# EAGLE board MK (EAGLE 9.6.2)
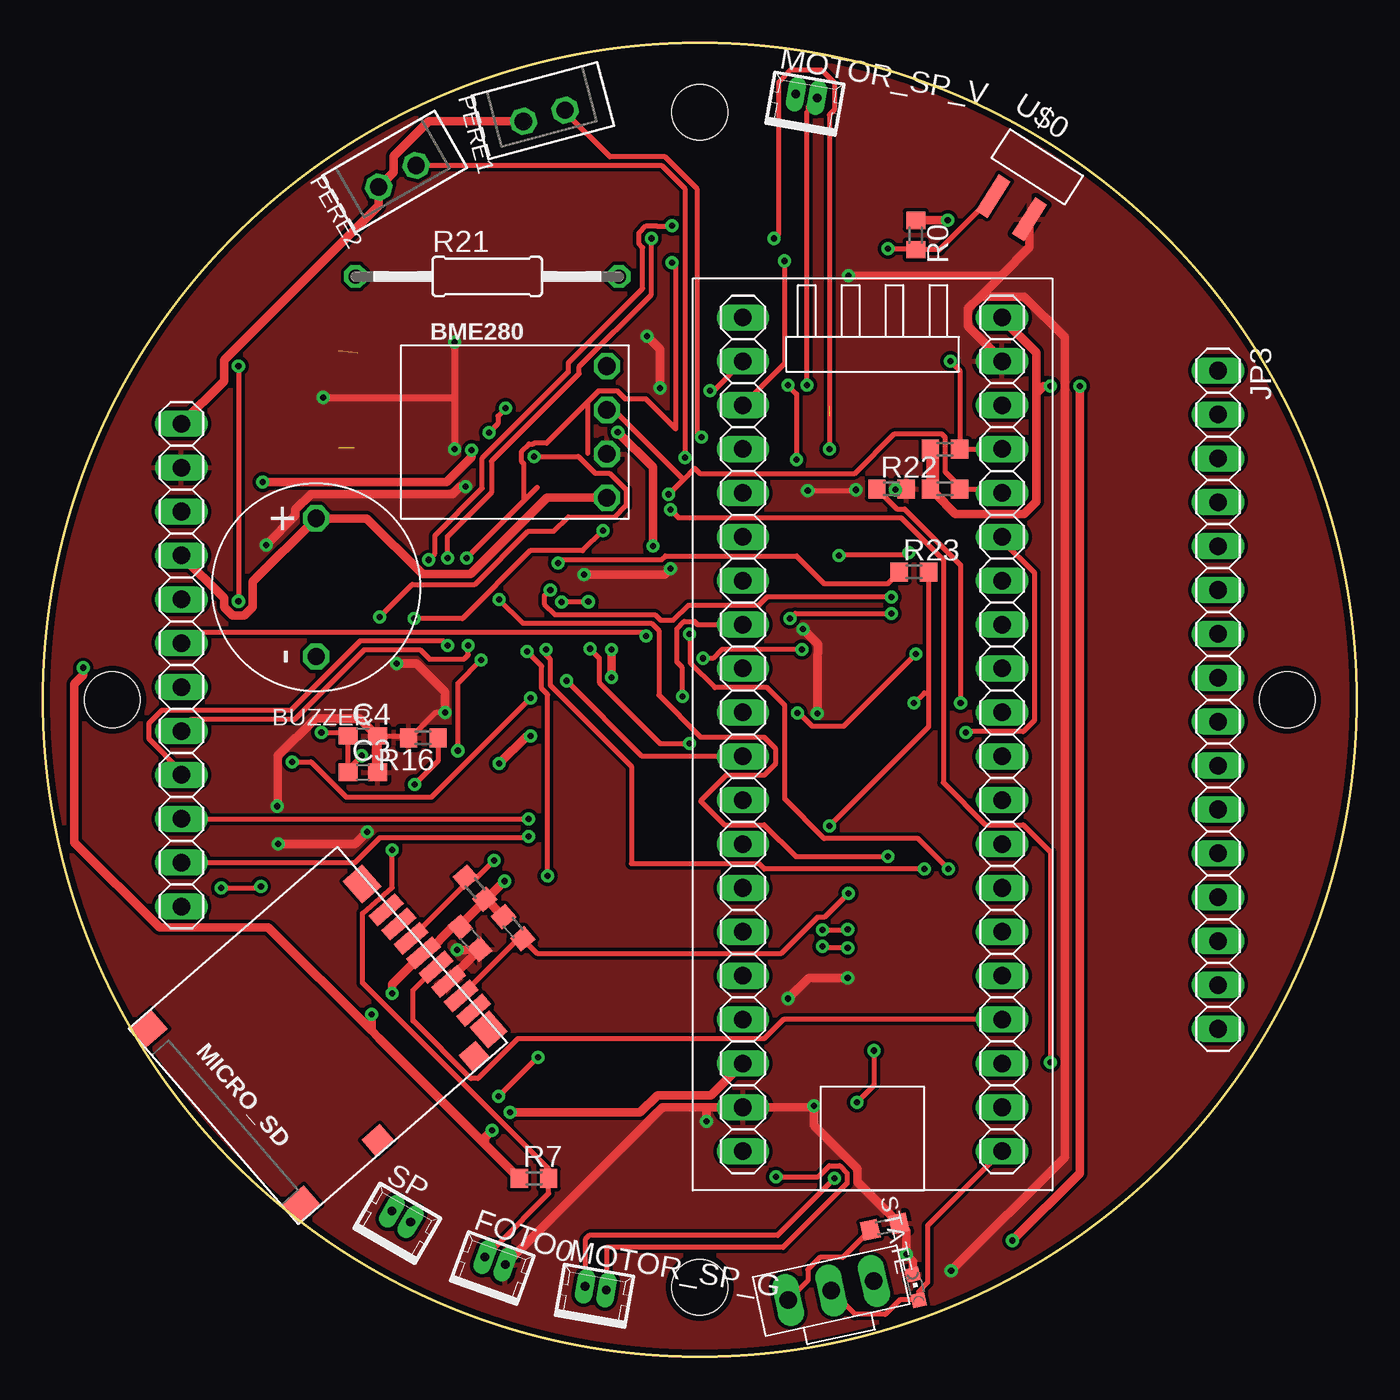
[diagram p0: board, top side]
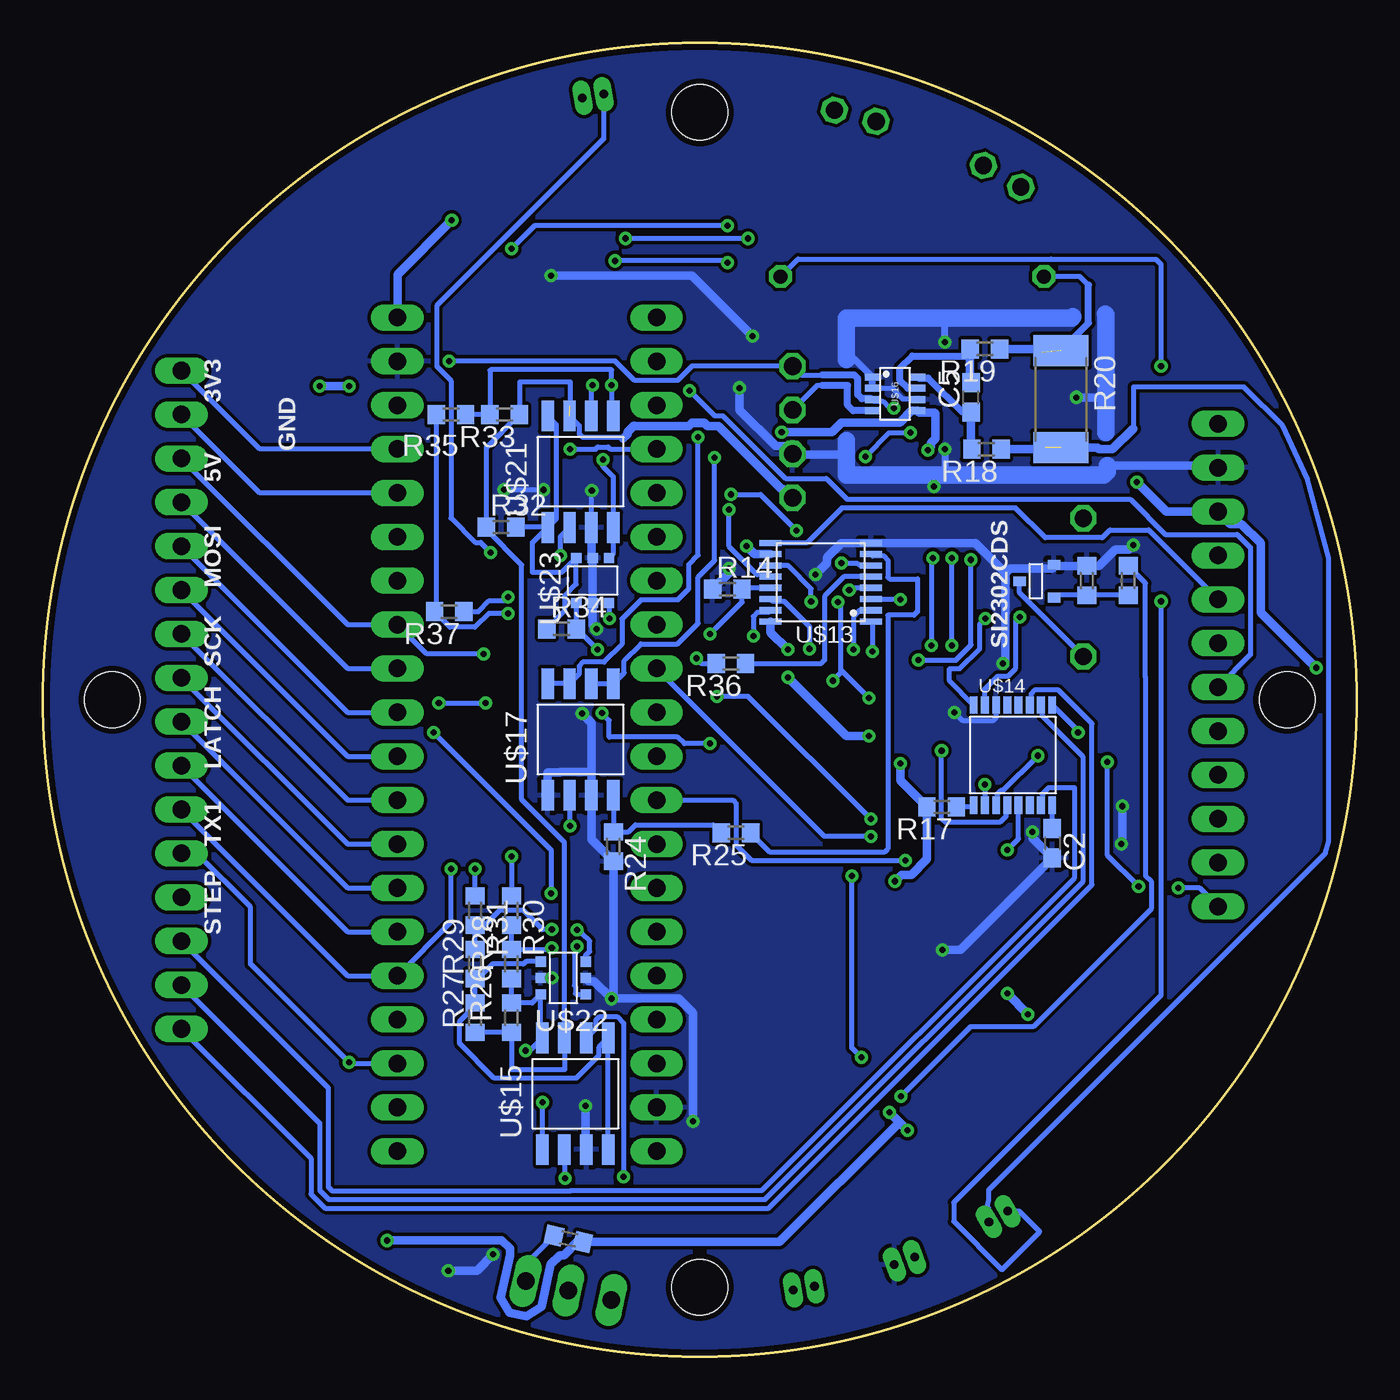
[diagram p1: board, bottom side, seen from below]

Size 76 x 76 mm. Coordinates in mm from the lower left corner, seen from the top.
Outline: circle at 38,38 radius 38
Copper layers (1*16): Top 0.035mm / dielectric 1.5mm / Bottom 0.035mm
Design rules "default *": minimum track width 0.3mm, minimum drill 0.35mm, track to track 0.2mm, track to pad 0.2mm, pad to pad 0.2mm, via to via 0.2mm, smd to smd 0.2mm, copper to edge 0.35mm, drill to drill 0.2mm, minimum pad ring 10mil, minimum via ring 8mil, stop-mask expansion 4mil, vias tented up to drill 0mil, thermal gap 10mil
Holes 3.2 mm at 4,38 38,4 72,38 38,72

## Footprints (pad centres in the part's own frame; a part is rotated, then mirrored left to right if it is on the bottom)
BME280-PINS-ONLY = drill 1.016 octagon: P$1 -3.81,5.33; P$2 -1.27,5.33; P$3 1.27,5.33; P$4 3.81,5.33
BUZZER-S8R12 = drill 1 octagon: P$1 -4,0; P$2 4,0
C0603 = smd 1.1 x 1: 1 -0.85,0; 2 0.85,0
53047-02 = drill 0.5 pad 0.698 long: 1 0.625,0.45; 2 -0.625,0.45
1X16 = drill 1.016 long: 1 -19.05,0; 2 -16.51,0; 3 -13.97,0; 4 -11.43,0; 5 -8.89,0; 6 -6.35,0; 7 -3.81,0; 8 -1.27,0; 9 1.27,0; 10 3.81,0; 11 6.35,0; 12 8.89,0; 13 11.43,0; 14 13.97,0; 15 16.51,0; 16 19.05,0
1X12 = drill 1.016 long: 1 -13.97,0; 2 -11.43,0; 3 -8.89,0; 4 -6.35,0; 5 -3.81,0; 6 -1.27,0; 7 1.27,0; 8 3.81,0; 9 6.35,0; 10 8.89,0; 11 11.43,0; 12 13.97,0
SD = smd 0.8 x 2: CLK 6,-15.77; CMD 8.2,-15.77; DAT0 3.8,-15.77; DAT1 2.7,-15.77; DAT2 10.4,-15.77; DAT3 9.3,-15.77; VDD 7.1,-15.77; VSS 4.9,-15.77 | smd 1.5 x 1.7: P$9 0.75,-0.85; P$13 14.25,-0.85 | smd 1.6 x 1.5: P$10 1.3,-15.7 | smd 1.29 x 1.3: P$11 0.645,-14.05 | smd 1.29 x 1.4: P$12 0.645,-6.65 | smd 1.7 x 1.5: P$14 12.45,-15.7
JST-2-2.5 = drill 1 pad 1.5 octagon: 1 1.25,0; 2 -1.25,0
R0603 = smd 1 x 1.1: 1 -0.85,0; 2 0.85,0
R2512 = smd 1.8 x 3.2: 1 -2.8,0; 2 2.8,0
0207/15 = drill 0.813 octagon: 1 -7.62,0; 2 7.62,0
SOT23-3 = smd 0.56 x 0.73: 1 -0.95,-1; 2 0.95,-1; 3 0,1
CHIPLED_0603 = smd 0.8 x 0.8: A 0,-0.75; C 0,0.75
STM32F411_BOARD = drill 1.016 long: 1 24.13,7.5; 2 21.59,7.5; 3 19.05,7.5; 4 16.51,7.5; 5 13.97,7.5; 6 11.43,7.5; 7 8.89,7.5; 8 6.35,7.5; 9 3.81,7.5; 10 1.27,7.5; 11 -1.27,7.5; 12 -3.81,7.5; 13 -6.35,7.5; 14 -8.89,7.5; 15 -11.43,7.5; 16 -13.97,7.5; 17 -16.51,7.5; 18 -19.05,7.5; 19 -21.59,7.5; 20 -24.13,7.5; 21 -24.13,-7.5; 22 -21.59,-7.5; 23 -19.05,-7.5; 24 -16.51,-7.5; 25 -13.97,-7.5; 26 -11.43,-7.5; 27 -8.89,-7.5; 28 -6.35,-7.5; 29 -3.81,-7.5; 30 -1.27,-7.5; 31 1.27,-7.5; 32 3.81,-7.5; 33 6.35,-7.5; 34 8.89,-7.5; 35 11.43,-7.5; 36 13.97,-7.5; 37 16.51,-7.5; 38 19.05,-7.5; 39 21.59,-7.5; 40 24.13,-7.5
VT93N1 = smd 0.8 x 2.5: P$1 -1.25,-1.8; P$2 1.25,-1.8
SWITCH_MSS = drill 1.016 long: 1 -2.54,0; 2 0,0; 3 2.54,0
TSSOP16 = smd 1.26 x 0.36: 1 -2.9,2.275; 2 -2.9,1.625; 3 -2.9,0.975; 4 -2.9,0.325; 5 -2.9,-0.325; 6 -2.9,-0.975; 7 -2.9,-1.625; 8 -2.9,-2.275; 9 2.9,-2.275; 10 2.9,-1.625; 11 2.9,-0.975; 12 2.9,-0.325; 13 2.9,0.325; 14 2.9,0.975; 15 2.9,1.625; 16 2.9,2.275
AD5593 = smd 0.45 x 1: P$1 -2.275,-2.9; P$2 -1.625,-2.9; P$3 -0.975,-2.9; P$4 -0.325,-2.9; P$5 0.325,-2.9; P$6 0.975,-2.9; P$7 1.625,-2.9; P$8 2.275,-2.9; P$9 2.275,2.9; P$10 1.625,2.9; P$11 0.975,2.9; P$12 0.325,2.9; P$13 -0.325,2.9; P$14 -0.975,2.9; P$15 -1.625,2.9; P$16 -2.275,2.9
SO8 = smd 0.72 x 1.78: 1 -1.905,-3.23; 2 -0.635,-3.23; 3 0.635,-3.23; 4 1.905,-3.23; 5 1.905,3.23; 6 0.635,3.23; 7 -0.635,3.23; 8 -1.905,3.23
SOT23-8 = smd 0.9 x 0.4: 1 -1.3,0.975; 2 -1.3,0.325; 3 -1.3,-0.325; 4 -1.3,-0.975; 5 1.3,-0.975; 6 1.3,-0.325; 7 1.3,0.325; 8 1.3,0.975
SOT23-6 = smd 0.6 x 0.6: 1 -0.95,-1.3; 2 0,-1.3; 3 0.95,-1.3; 4 0.95,1.3; 5 0,1.3; 6 -0.95,1.3

## Placement (x,y rotation side)
BME280  BME280BME280-PINS-ONLY  [BME280-PINS-ONLY]  27.3,53.5 270 top
BUZZER  BUZZERS8R6  [BUZZER-S8R12]  15.8,44.5 90 top
C1  100nF  [C0603]  24.7,24.2 131 top
C2  100nF  [C0603]  17.6,29.7 270 bottom
C3  100nF  [C0603]  18.5,33.8 0 top
C4  100nF  [C0603]  18.5,35.9 0 top
C5  100nF  [C0603]  22.3,55.5 90 bottom
FOTO0  MOLEX-2-1.25  [53047-02]  26,5.1 340 top
JP3  [1X16]  68,38 270 top
JP4  [1X12]  8,40 270 top
MICRO_SD  SD  [SD]  14.78,7.65 131 top
MOTOR_SP_G  MOLEX-2-1.25  [53047-02]  31.9,3.5 350 top
MOTOR_SP_V  MOLEX-2-1.25  [53047-02]  44.1,72.5 350 top
PERE1  JST-2-2.5  [JST-2-2.5]  29,71.8 195 top
PERE2  JST-2-2.5  [JST-2-2.5]  20.5,68.3 210 top
R0  2k2  [R0603]  50.5,64.9 270 top
R1  2k  [R0603]  48.7,7.5 12.5 top
R2  2k  [R0603]  45.6,6.8 347.5 bottom
R3  5k1  [R0603]  52.2,52.5 180 top
R4  5k1  [R0603]  52.2,50.2 180 top
R5  10k  [R0603]  27.2,24.8 311 top
R6  10k  [R0603]  25,27.1 131 top
R7  2k2  [R0603]  28.4,10.3 0 top
R9  10k  [R0603]  15.6,44.9 90 bottom
R10  100R  [R0603]  13.2,44.9 270 bottom
R14  5k1  [R0603]  36.4,44.4 0 bottom
R16  5k1  [R0603]  22,35.8 180 top
R17  5k1  [R0603]  24,31.8 180 bottom
R18  5k1  [R0603]  21.4,52.5 180 bottom
R19  5k1  [R0603]  21.5,58.3 180 bottom
R20  R05  [R2512]  17.1,55.4 270 bottom
R21  [0207/15]  25.7,62.5 0 top
R22  5k1  [R0603]  49.1,50.2 0 top
R23  5k1  [R0603]  50.4,45.4 0 top
R24  5k1  [R0603]  43,29.5 270 bottom
R25  5k1  [R0603]  35.9,30.3 180 bottom
R26  5k1  [R0603]  48.9,19.6 90 bottom
R27  5k1  [R0603]  51,19.6 90 bottom
R28  5k1  [R0603]  48.9,22.7 90 bottom
R29  5k1  [R0603]  51,22.7 90 bottom
R30  5k1  [R0603]  48.9,25.8 270 bottom
R31  5k1  [R0603]  51,25.8 270 bottom
R32  5k1  [R0603]  49.5,48 0 bottom
R33  5k1  [R0603]  49.3,54.5 180 bottom
R34  5k1  [R0603]  46,42.1 0 bottom
R35  5k1  [R0603]  52.4,54.5 180 bottom
R36  5k1  [R0603]  36.2,40.1 180 bottom
R37  5k1  [R0603]  52.5,43.1 180 bottom
SI2302CDS  SI2302CDS  [SOT23-3]  18.49,44.86 90 bottom
SP  MOLEX-2-1.25  [53047-02]  20.5,7.7 330 top
STATE  [CHIPLED_0603]  50.5,4 12.5 top
STM32F411  STM32F411_BOARD  [STM32F411_BOARD]  48,36 90 top
U$0  VT93N1  [VT93N1]  57,68 327.5 top
U$1  Плата МК  [LOGO]  118.4,21.6 0 top  (outside the outline)
U$2  SWITCH_MSS  [SWITCH_MSS]  45.6,3.8 192.5 top
U$13  74HC595  [TSSOP16]  31,44.8 180 bottom
U$14  AD5593  [AD5593]  19.88,34.8 0 bottom
U$15  MOSFET_2P+2N_AP9930GM  [SO8]  45.2,15.2 0 bottom
U$16  INA219AID  [SOT23-8]  26.7,55.7 0 bottom
U$17  IRF7905PBF  [SO8]  44.9,35.7 0 bottom
U$21  MOSFET_2P+2N_AP9930GM  [SO8]  44.9,51.2 0 bottom
U$22  NDC7002N  [SOT23-6]  45.9,21.9 90 bottom
U$23  NDC7002N  [SOT23-6]  44.2,44.9 0 bottom

## Library data of the parts
BME280 FOTO0 MICRO_SD MOTOR_SP_G MOTOR_SP_V PERE1 PERE2 SP STM32F411 U$1 U$2 U$14 U$15 U$17 U$21-U$23 = UNKNOWN-2024
BUZZER SI2302CDS U$13 U$16 = CanCubeSat
C1-C5 = rcl; SPICEPREFIX: C
JP3 JP4 = pinhead
R0 R1-R7 R9 R10 R14 R16-R37 = rcl; SPICEPREFIX: R
STATE = led
U$0 = KNPN-2023

## Nets
3V3: C1.2 JP4.3 MICRO_SD.VDD R0.1 R2.2 R3.2 R4.2 R5.1 R6.1 R7.1 R17.2 STM32F411.18 STM32F411.40 U$13.10 U$13.16 U$16.5
4V: JP4.1 PERE1.1 PERE2.1
5V: BME280.P$4 BUZZER.P$2 JP4.4 R26.1 R27.1 R32.1 R33.1 U$15.7 U$21.7
AUX_RADIO: JP4.7 STM32F411.2
BUZZER: R10.1 U$13.1
C0: JP3.13
CK_SD: MICRO_SD.CLK STM32F411.24
CMD_SD: MICRO_SD.CMD R6.2 STM32F411.12
CO: U$14.P$6
CS_LIS: JP3.9 STM32F411.27
CS_LSM: JP3.10 STM32F411.26
D0_SD: MICRO_SD.DAT0 R5.2 STM32F411.35
FOTO0: FOTO0.2 R7.2 U$14.P$5
GERMO: JP4.6 U$13.15
GND: BME280.P$3 C1.1 C2.2 C3.2 C4.2 FOTO0.1 JP4.2 MICRO_SD.VSS R1.2 R9.2 R14.1 R16.2 R22.2 R24.2 SI2302CDS.2 STATE.C STM32F411.19 STM32F411.39 U$0.P$2 U$13.8 U$14.P$14 U$15.3 U$16.1 U$16.2 U$16.6 U$17.1 U$17.3 U$21.3 U$22.2 U$22.5 U$23.2 U$23.5
INA_SP+: R19.1 R20.1 R21.1
LATCH_SR: JP3.12 STM32F411.23 U$13.12
M0_RADIO: JP4.9 STM32F411.4
M1_RADIO: JP4.8 STM32F411.3
MICS: JP3.16 U$14.P$11
MISO_SENS: JP3.4 STM32F411.32
MK_MOTOR1+: R37.1 U$13.4
MK_MOTOR1-: R36.1 U$13.5
MK_MOTOR2+: R31.1 U$13.2
MK_MOTOR2-: R30.1 U$13.3
MOSI_SENS: JP3.3 STM32F411.33 U$13.14
MOTOR1+: MOTOR_SP_V.1 U$21.6
MOTOR1-: MOTOR_SP_V.2 U$21.2
MOTOR2+: MOTOR_SP_G.1 U$15.6
MOTOR2-: MOTOR_SP_G.2 U$15.2
N$1: R1.1 U$2.3
N$2: R2.1 U$2.1
N$4: R0.2 U$0.P$1 U$14.P$4
N$11: C2.1 U$14.P$8
N$13: BUZZER.P$1 SI2302CDS.3
N$14: R9.1 R10.2 SI2302CDS.1
N$15: C5.2 R19.2 U$16.7
N$16: C3.1 C4.1 U$14.P$3 U$14.P$9
N$17: R16.1 U$14.P$2
N$18: C5.1 R18.2 U$16.8
N$19: R17.1 U$14.P$1
N$20: PERE1.2 U$17.7 U$17.8
N$21: PERE2.2 U$17.5 U$17.6
N$22: R22.1 R23.2 U$17.2
N$23: R24.1 R25.2 U$17.4
N$24: R32.2 R34.1 U$21.1 U$21.8 U$23.6
N$25: R26.2 R28.1 U$15.1 U$15.8 U$22.6
N$26: R27.2 R29.1 U$15.4 U$15.5 U$22.4
N$27: R33.2 R35.1 U$21.4 U$21.5 U$23.4
N$28: R34.2 R36.2 U$23.1
N$29: R35.2 R37.2 U$23.3
N$32: R28.2 R30.2 U$22.1
N$35: R29.2 R31.2 U$22.3
NH3: JP3.15 U$14.P$10
NO2: JP3.14 U$14.P$7
OE_SR: JP3.11 R14.2 STM32F411.25 U$13.13
PERE1: R23.1 U$13.6
PERE2: R25.1 U$13.7
RX_GPS: JP4.11 STM32F411.9
RX_LIDAR: JP3.7 STM32F411.29
RX_RADIO: JP3.5 STM32F411.31
SCK_SENS: JP4.12 STM32F411.11 U$13.11
SCL: BME280.P$2 JP3.2 R4.1 STM32F411.36 U$14.P$16 U$16.4
SDA: BME280.P$1 JP3.1 R3.1 STM32F411.37 U$14.P$15 U$16.3
SHIFT: JP4.5 U$13.9
SP+: R18.1 R20.2 SP.1
SP-: R21.2 SP.2
SWITCH: STATE.A STM32F411.21 U$2.2
TX_GPS: JP4.10 STM32F411.8
TX_LIDAR: JP3.8 STM32F411.28
TX_RADIO: JP3.6 STM32F411.30

## Tracks (layer width: path | path; a pad name or v marks a point on that pad's centre or on a via)
3V3  (via drill 0.35)
  Top 0.5: 25.7,26.5 R6.1 25.64,26.46 26.6,25.5 R5.1 | 25.7,26.5 24.14,24.94 C1.2 23.71,24.84 22.23,23.36 MICRO_SD.VDD 20.2,21.53 v20.2,21 | v12.7,50.6 23.35,50.6 24.8,52.05 v24.8,52.45 | v35.3,46.9 35.3,51.45 v33.26,53.5 | v26.7,27.5 25.7,26.5 | v26.39,34.3 27.99,35.9 v28.2,35.9 | v32.9,40.9 v32.9,39.3 | R7.1 25.57,12.28 | 25.57,12.28 19.43,18.43 19,18.85 | 19,18.85 v19,19.8 | 25.57,12.28 25.57,12.68 v25.98,13.08 | v27.01,14.11 34.55,14.11 35.55,15.11 38.66,15.11 STM32F411.18 | R4.2 R3.2 51.6,52.25 51.6,49.96 52.81,48.76 56.76,48.76 57.47,49.47 57.47,55.75 | STM32F411.40 55.5,60.07 57.47,58.09 57.47,55.75 | R0.1 v52.35,65.75 | 57.47,55.75 57.87,56.15 v58.3,56.15 | v60,56.15 60,10.6 v56.1,6.7 | v2.33,39.85 2.33,39.44 1.8,38.91 1.8,29.75 6.74,24.82 13.03,24.82 19,18.85
  Bottom 0.5: U$13.10 34.83,46.42 v35.3,46.9 | v12.7,50.6 10.99,48.89 JP4.3 7.29,48.17 6.64,48.17 5.53,47.06 5.53,43.05 v2.33,39.85 | v33.26,53.5 30.34,53.5 29.79,54.05 26.43,54.05 25.75,54.73 U$16.5 25.3,54.62 24.43,54.62 24.35,54.55 24.35,53.12 24.63,52.84 24.63,52.62 v24.8,52.45 | v26.7,27.5 26.33,27.87 25.76,27.87 24.85,28.78 R17.2 26.39,33.34 v26.39,34.3 | U$13.16 33.9,41.9 v32.9,40.9 | v32.9,39.3 29.5,35.9 v28.2,35.9 | v19,19.8 v20.2,21 | v25.98,13.08 26.45,13.55 | 26.45,13.55 v27.01,14.11 | 26.45,13.55 33.38,6.62 R2.2 45.1,6.62 45.86,5.86 46.09,5.86 46.62,5.32 47.17,2.85 48.02,2.31 49,2.53 49.54,3.38 48.99,5.85 48.99,6.24 49.48,6.73 50.29,6.73 50.32,6.7 v56.1,6.7 | v52.35,65.75 55.5,62.6 STM32F411.40 | v58.3,56.15 v60,56.15
4V
  Top 0.5: JP4.1 10.47,56.44 10.47,57.64 19.42,66.59 PERE2.1 20.29,68.55 20.29,69.46 22.31,71.48 PERE1.1
5V  (1 unrouted)
  Top 0.5: JP4.4 10.47,43.88 10.47,43.36 10.96,42.87 11.64,42.87 12.13,43.36 12.13,44.83 BUZZER.P$2 18.73,48.5 21.96,45.27 24.74,45.27 29.17,49.7 BME280.P$4
  Bottom 0.3: R27.1 R26.1 48.9,16.6 45.8,16.6 45.8,18.39 U$15.7 45.84,29.75 48.3,32.22 48.3,45.8 50.35,47.85 R32.1 50.35,52.6 R33.1 48.4,54.55 48.4,56.4 45.5,56.4 45.5,55 | U$21.7 44.98,53.87 44.98,53.4 44.77,53.19 42.49,53.19 41.8,53.88 41.74,53.94 36.88,53.94
  Bottom 0.5: BME280.P$4 33.14,50.2 33.28,50.2 36.92,53.84 37.56,53.84 37.75,54.03 38.43,54.03 38.62,53.84 41.76,53.84 41.8,53.88 42.19,53.49 42.19,53.35 42.43,53.11
AUX_RADIO  (via drill 0.35)
  Top 0.3: STM32F411.2 38.81,55.9 v38.6,55.9
  Bottom 0.3: v38.6,55.9 37.14,54.44 36.67,54.44 33.03,50.8 30.67,50.8 29.47,49.6 13.09,49.6 11.06,47.58 6.89,47.58 6.13,46.81 6.13,40.6 JP4.7
BUZZER  (via drill 0.35)
  Top 0.3: v26.35,15.05 28.6,17.3 v28.65,17.3 | v29.2,27.8 29.2,38.29 28.85,38.64 28.85,39.95 v28,40.8
  Bottom 0.3: U$13.1 28,42.42 v28,40.8 | R10.1 12.2,44.75 12.2,39.3 12.2,27.83 11.87,27.5 11.87,25.9 18.7,19.07 22.33,19.07 v26.35,15.05 | v28.65,17.3 29.2,17.85 v29.2,27.8
CK_SD
  Top 0.3: 22.43,22.21 MICRO_SD.CLK 21.4,21.18 21.4,19.4 21.43,19.4 24.74,16.08 25.17,16.08 27.47,18.38 41.72,18.38 42.84,19.49 STM32F411.24
CMD_SD  (via drill 0.35)
  Top 0.3: MICRO_SD.CMD 24.4,27.28 R6.2 25.14,27.74 v26.1,28.7
  Bottom 0.3: v26.1,28.7 34.99,28.7 35.9,29.61 35.9,32.01 36.09,32.19 STM32F411.12
CS_LIS
  Bottom 0.3: JP3.9 58.38,27.11 STM32F411.27
CS_LSM
  Bottom 0.3: JP3.10 58.38,24.57 STM32F411.26
D0_SD  (via drill 0.35)
  Top 0.3: 24.13,20.81 MICRO_SD.DAT0 27.52,24.2 R5.2 28.62,23.3 42.69,23.3 44.8,25.41 45.21,25.41 v46.6,26.8 | STM32F411.35 55.5,47.23 57.37,45.35 57.37,36.81 56.72,36.16 53.46,36.16 v53.4,36.1
  Bottom 0.3: v53.4,36.1 46.6,29.3 v46.6,26.8
FOTO0  (via drill 0.35)
  Top 0.3: FOTO0.2 26.23,6.4 29.25,9.43 R7.2 29.25,10.84 18.48,21.61 18.48,25.64 18.5,25.66 20.2,27.14 v20.2,29.3
  Bottom 0.3: v20.2,29.3 19.55,29.95 U$14.P$5
GERMO  (via drill 0.35)
  Top 0.3: JP4.6 8.63,41.9 34.7,41.9 v34.9,41.7
  Bottom 0.3: U$13.15 34.02,43.05 34.67,43.05 34.9,42.83 v34.9,41.7
GND  (via drill 0.35)
  Top 0.3: v44.25,50.1 47,50.1 v47.05,50.15 | v49.33,50.15 49.9,50.15 R22.2 | v23.25,37.25 22.7,37.25 21.25,35.8 R16.2 21.05,35.9 C4.2
  Top 0.4: v23.8,58.7 23.8,55.5 | 23.8,55.5 v23.8,52.5 | v16.2,55.5 23.8,55.5
  Top 0.5: MICRO_SD.VSS 23.47,21.77 C1.1 25.23,23.53 v23.96,23.53 | FOTO0.1 35.84,14.41 38.4,14.41 | 38.4,14.41 STM32F411.19 44.51,14.41 v44.6,14.5 44.6,13.38 47.13,10.85 47.13,10.09 R1.2 49.95,7.26 v49.95,5.9 50.34,5.51 STATE.C | v38.4,13.6 38.4,14.41 | v46.56,21.9 44.31,21.9 v43.12,20.7 | v44.8,37.2 44.8,40.63 44.84,40.66 44.84,41.24 v43.97,42.1 | v12.9,46.95 14.6,48.65 14.6,49 15.5,49.9 23.69,49.9 24.12,50.33 v24.45,50.33 | v23.25,37.25 23.25,38.45 21.6,40.1 v20.45,40.1 | v36.32,45.59 35.98,45.25 v31.3,45.25 | U$0.P$2 57.09,64.19 55.45,62.55 | 55.45,62.55 54.24,61.34 | 54.24,61.34 53.53,60.63 53.53,59.63 55.5,57.65 STM32F411.39 | 54.24,61.34 56.76,61.34 59.13,58.98 59.13,11.53 v52.55,4.95 | 55.45,62.55 v46.6,62.55 | v34.95,59.05 35.7,58.3 v35.7,56.05 | C4.2 C3.2 19.27,33.88 19.27,35.97 18.31,36.93 15.76,36.93 13.57,34.74 13.57,31.86 v13.55,31.84 | v13.6,29.65 18.05,29.65 v18.75,30.35
  Bottom 0.3: U$16.2 26.89,56.02 26.29,55.42 25.45,55.42 U$16.6 | U$21.3 44.27,50.09 v44.25,50.1 | v47.05,50.15 v49.33,50.15 | U$14.P$14 20.85,36.95 21,36.8 22.8,36.8 v23.25,37.25
  Bottom 0.4: U$16.2 U$16.1 29.02,57.7 29.5,57.7 | v23.8,58.7 23.8,60.1 | v23.8,52.5 23.8,51
  Bottom 0.5: v16.2,55.5 14.5,55.5 | 29.5,52.18 32.58,52.18 BME280.P$3 33.07,52.67 33.6,52.67 35.7,54.77 v35.7,56.05 | 14.4,51.55 8.12,51.55 JP4.2 | v44.6,14.5 44.6,12.01 U$15.3 | U$22.2 44.4,21.7 44.11,21.7 v43.12,20.7 | v43.12,20.7 39.24,20.7 38.4,19.87 v38.4,13.6 | U$22.5 v46.56,21.9 | v43.12,20.7 43,20.82 R24.2 44.27,29.91 U$17.3 44.27,33.77 | U$17.1 46.8,33.8 46.09,33.8 46.08,33.81 44.31,33.81 44.27,33.77 | U$21.3 44.27,46.27 U$23.5 U$23.2 44.2,42.33 v43.97,42.1 | 44.27,33.77 44.27,36.66 v44.8,37.2 | 17.43,45.75 R9.2 14.89,45.75 13.94,46.7 13.15,46.7 v12.9,46.95 | 17.43,45.75 SI2302CDS.2 | v24.45,50.33 24.45,50.9 24.55,51 | 20.31,45.33 20.05,45.59 17.59,45.59 17.43,45.75 | v20.45,40.1 20.31,40.24 20.31,45.33 | 20.31,45.33 22.05,47.08 U$13.8 29.8,47.08 30.63,46.24 30.63,45.92 v31.3,45.25 | R14.1 36.32,45.33 v36.32,45.59 | v52.55,4.95 50.9,4.95 v49.95,5.9 | v46.6,62.55 38.45,62.55 v34.95,59.05 | v13.55,31.84 13.55,29.7 v13.6,29.65 | v18.75,30.35 18.75,30 C2.2 22.92,23.53 v23.96,23.53
  Bottom 1: 29.5,57.7 29.5,60.1 23.8,60.1 16.47,60.1 16.4,60.17 | 14.4,51.55 14.4,51.2 14.6,51 23.8,51 24.55,51 29.5,51 29.5,52.18 | 14.5,53.45 14.5,55.5 14.5,60.3 14.53,60.33 | 29.5,52.2 29.5,52.98 29.51,52.99
  pour Bottom: 20.8,78.6 57.8,78.6 78.3,58.1 78.3,8.6 66.8,-2.9 12.5,-2.9 -3.1,12.7 -3.1,54.7
  pour Top: -4.1,54.7 21,79.8 58.1,79.8 79.4,58.5 79.4,8.3 67.4,-3.7 12.5,-3.7 -4.1,12.9
INA_SP+  (1 unrouted)
  Bottom 0.3: 18.4,58.3 18.2,58.1 | 15.5,62 16,62.5 R21.1
  Bottom 0.4: R20.1 15.5,59.8 15.5,62
  Bottom 0.5: R19.1 18.4,58.3
LATCH_SR  (via drill 0.35)
  Top 0.3: v36.3,49 36.76,48.54 49.65,48.54 52.1,46.09 52.1,33.2 54.54,30.76 56.72,30.76 58.3,29.18 v58.3,17
  Bottom 0.3: U$13.12 34.02,45.24 34.67,45.24 36.3,46.87 v36.3,49 | STM32F411.23 58.25,16.95 v58.3,17 64,22.7 64,26 67.11,29.11 JP3.12
M0_RADIO  (via drill 0.35)
  Top 0.3: JP4.9 8,33.85 6.13,35.73 6.13,36.65 6.88,37.4 14.35,37.4 18.35,41.4 23.15,41.4 v23.4,41.15 | v35.2,64.7 35.2,61.45 31.02,57.27 31.02,56.87 25.95,51.8 25.95,50 23.4,47.45 v23.4,46.2 | v42.3,64.7 42.57,64.97 42.57,73.75 43.28,74.45 45.04,74.45 45.78,73.7 45.78,72.14 45.5,71.86 v45.5,52.5
  Bottom 0.3: v23.4,41.15 v23.4,46.2 | v35.2,64.7 v42.3,64.7 | v45.5,52.5 44.03,52.5 43.9,52.63 43.3,52.63 43.18,52.51 STM32F411.4
M1_RADIO  (via drill 0.35)
  Top 0.3: v24.6,41.15 24.6,40.6 24.35,40.35 22.35,40.35 21.8,40.9 18.6,40.9 14.55,36.85 8.56,36.85 8,36.29 JP4.8 | v36.4,63.3 36.6,63.1 36.6,53.68 34.87,55.42 33.67,55.42 33.2,55.88 32.17,55.88 31.52,55.23 | v42.9,63.4 42.9,57.45 STM32F411.3 | 31.52,55.23 31.52,52.25 | v24.5,46.2 27.82,49.52 | 27.82,49.52 28.6,50.3 | 31.52,55.23 29.14,52.85 28.41,52.85 28.36,52.81 28.12,52.81 27.69,52.38 27.69,51.78 27.82,51.65 27.82,49.52
  Bottom 0.3: v24.5,46.2 24.6,46.1 v24.6,41.15 | v36.4,63.3 36.4,63.4 v42.9,63.4
MICS
  Bottom 0.3: JP3.16 60.5,11.45 60.5,9.39 59.69,8.57 34.01,8.57 15.3,27.29 15.3,36.62 17.23,38.55 18.62,38.55 18.82,38.34 18.82,37.77 U$14.P$11
MISO_SENS
  Bottom 0.3: JP3.4 58.38,39.81 STM32F411.32
MK_MOTOR1+  (via drill 0.35)
  Top 0.3: v49.1,43.96 41.9,43.96 41.42,43.48 37.34,43.48 36.46,42.6 35.74,42.6 35.41,42.93 29.62,42.93 29,43.55 29,44 v29.35,44.35
  Bottom 0.3: R37.1 50.81,43.1 50.18,43.73 49.33,43.73 v49.1,43.96 | v29.35,44.35 29.2,44.5 28.12,44.5 U$13.4
MK_MOTOR1-
  Bottom 0.3: U$13.5 29.65,45.12 30.78,44 30.78,40.29 30.97,40.1 R36.1
MK_MOTOR2+  (via drill 0.35)
  Top 0.3: v51,28.2 41.74,28.2 41.42,28.52 34.05,28.52 34.05,34.15 29.35,38.85 29.35,40.35 29.1,40.6 v29.1,40.9
  Bottom 0.3: R31.1 v51,28.2 | U$13.2 28.75,43.17 29.1,42.83 v29.1,40.9
MK_MOTOR2-  (via drill 0.35)
  Top 0.3: v48.9,28.93 43.56,28.93 41.72,30.76 39.43,30.76 38.05,32.14 39.53,33.62 41.72,33.62 42.37,34.27 42.37,35.19 41.72,35.84 38.05,35.84 35.63,38.27 35.63,42 35.2,42.43 27.76,42.43 v26.39,43.8
  Bottom 0.3: U$13.3 26.42,43.83 v26.39,43.8 | v48.9,28.93 R30.1
MOSI_SENS  (via drill 0.35)
  Top 0.3: v31.65,40.95 32.17,40.43 32.17,39 35.71,35.46 v37.4,35.46 | v43.65,37.22 43.75,37.22 44.5,36.47 46.34,36.47 v50.52,40.65
  Bottom 0.3: JP3.3 58.38,42.35 STM32F411.33 53.8,40.65 v50.52,40.65 | U$13.14 33.78,43.7 33.12,43.7 31.65,42.23 v31.65,40.95 | v37.4,35.46 38.89,35.46 39.28,35.84 43.24,35.84 | 43.25,35.85 43.24,35.84 | 43.24,35.84 43.24,36.81 v43.65,37.22
MOTOR1+  (via drill 0.35)
  Top 0.3: MOTOR_SP_V.1 44.3,72.35 44.3,72.11 44.2,72 v44.2,56.2
  Bottom 0.3: U$21.6 44.27,56.13 v44.2,56.2
MOTOR1-  (via drill 0.35)
  Top 0.3: v50.1,46.53 49.95,46.38 46.09,46.38 v46.07,46.35
  Bottom 0.3: MOTOR_SP_V.2 43.56,70.47 53.23,60.8 53.23,57.3 52.4,56.47 52.4,48.51 50.99,47.1 50.67,47.1 v50.1,46.53 | v46.07,46.35 46.07,47.44 U$21.2
MOTOR2+  (via drill 0.35)
  Top 0.3: v42.4,10.4 44.87,10.4 45.5,11.03 46.1,11.03 46.53,10.6 46.53,10 42.83,6.3 32.6,6.3 32.59,6.29 MOTOR_SP_G.1
  Bottom 0.3: U$15.6 44.01,18.99 44.01,19.46 43.8,19.67 42.79,19.67 42.4,19.28 v42.4,10.4
MOTOR2-  (via drill 0.35)
  Top 0.3: v45.8,10.3 42.5,7 31.6,7 31.36,6.76 MOTOR_SP_G.2
  Bottom 0.3: U$15.2 45.84,10.34 v45.8,10.3
N$1
  Top 0.3: R1.1 46.28,5.73 44.94,5.73 44.25,5.04 44.25,4.38 U$2.3
N$2
  Bottom 0.3: R2.1 48.08,5.33 U$2.1
N$4  (via drill 0.35)
  Top 0.3: U$0.P$1 51.88,64.05 R0.2 50.45,64.1 v48.9,64.1 | v24,35.05 24,38.95 v25.35,40.3 | v22.3,46.1 22.67,46.47 22.67,47.5 25.41,50.24 25.41,51.99 30.4,56.98 30.4,57.5 34.7,61.8 34.7,64.17 34.47,64.4 34.47,65 34.9,65.43 35.5,65.43 35.53,65.4 36.6,65.4 36.57,65.43 v36.41,65.43
  Bottom 0.3: U$14.P$4 20.27,31.83 20.27,31.26 20.63,30.9 23.8,30.9 24,31.1 v24,35.05 | v25.35,40.3 23.17,40.3 22.3,41.17 v22.3,46.1 | v36.41,65.43 47.57,65.43 v48.9,64.1
N$11
  Bottom 0.3: C2.1 U$14.P$8
N$13
  Bottom 0.3: BUZZER.P$1 19.49,44.19 SI2302CDS.3
N$14
  Bottom 0.3: R10.2 R9.1 17.36,44.05 SI2302CDS.1
N$15
  Bottom 0.4: U$16.7 25.97,56.02 26.4,56.46 26.4,57.2 25.7,57.9 22.45,57.9 22.35,57.8
  Bottom 0.5: R19.2 22.35,57.8 22.35,56.4 C5.2
N$16  (via drill 0.35)
  Top 0.3: v18.44,34.76 17.65,33.97 C3.1 C4.1 17.45,36.1 v16.1,36.1
  Bottom 0.3: U$14.P$3 20.77,31.98 20.77,32.55 20.57,32.75 20.45,32.75 v18.44,34.76 | U$14.P$9 16.1,36.2 v16.1,36.1
N$17  (via drill 0.35)
  Top 0.3: R16.1 22.85,34.45 v21.5,33.1
  Bottom 0.3: v21.5,33.1 U$14.P$2
N$18
  Bottom 0.4: U$16.8 25.35,56.62 24.78,56.62 22.81,54.65 C5.1
  Bottom 0.5: C5.1 22.3,52.55 R18.2
N$19
  Bottom 0.3: U$14.P$1 22.25,31.8 R17.1
N$20  (via drill 0.35)
  Top 0.3: v38.09,53.2 37.86,53.43 37.86,67.54 35.98,69.42 32.8,69.42 30.21,72.02 PERE1.2
  Bottom 0.3: U$17.8 U$17.7 44.98,39.49 44.98,39.97 44.77,40.17 43.53,40.17 42.5,41.2 42.5,42.69 41.41,43.78 39.28,43.78 38.63,44.43 38.63,45.84 38.09,46.37 v38.09,53.2
N$21  (via drill 0.35)
  Top 0.3: PERE2.2 35.77,68.92 37.13,67.56 v37.13,52.02
  Bottom 0.3: U$17.6 U$17.5 42.37,39.55 42.37,40.27 41.41,41.24 39.28,41.24 38.1,42.41 38.1,45.09 37.13,46.06 v37.13,52.02
N$22  (via drill 0.35)
  Top 0.3: v45.5,30.7 51.25,36.45 51.25,38.4 | 51.25,38.4 R23.2 | R22.1 49.41,49.04 49.86,49.04 53.1,45.8 v53.1,37.8 | v50.4,37.8 51,38.4 51.25,38.4
  Bottom 0.3: U$17.2 45.53,30.73 v45.5,30.7 | v53.1,37.8 v50.4,37.8
N$23
  Bottom 0.3: R25.2 37.21,30.76 41.72,30.76 42.13,30.35 R24.1 U$17.4
N$24
  Bottom 0.3: R34.1 45.8,43.15 45.8,44.05 45.15,44.7 U$23.6 45.97,45.38 47.7,45.38 47.7,47.07 U$21.1 | U$21.1 46.84,48 R32.2 | U$21.8 46.3,53.93 46.3,48.47 U$21.1
N$25  (via drill 0.35)
  Top 0.3: v47.1,14.7 48.1,15.7 v48.1,17.7 v48.09,17.69
  Bottom 0.3: R28.1 R26.2 47.7,20.45 U$22.6 47.2,18.52 U$15.8 47.84,17.69 v48.09,17.69 | U$15.1 v47.1,14.7
N$26
  Bottom 0.3: 51,21.7 R27.2 51,20.3 51.9,19.39 51.9,18.11 49.9,16.1 45.15,16.1 43.85,17.39 43.85,17.87 U$15.5 U$15.4 | 51,21.7 R29.1 | U$22.4 48.05,22.85 48.2,22.7 50,22.7 51,21.7
N$27  (via drill 0.35)
  Top 0.3: v43.1,56.2 43.6,55.7 v43.6,51.9
  Bottom 0.3: U$23.4 42.99,46.45 U$21.4 42.99,50.9 43.6,51.5 v43.6,51.9 | U$21.5 43.1,54.53 v43.1,56.2 43.1,57.1 50.1,57.1 50.15,57.05 R33.2 R35.1
N$28  (via drill 0.35)
  Top 0.3: v38.2,40.4 38.76,40.4 39.26,40.91 v43.91,40.91
  Bottom 0.3: v43.91,40.91 45.1,42.1 R34.2 U$23.1 | v38.2,40.4 37.9,40.1 R36.2
N$29  (via drill 0.35)
  Top 0.3: v43.23,42.7 43.53,43 v49.1,43
  Bottom 0.3: R35.2 53.25,43.2 R37.2 52.45,42.2 51.01,42.2 50.2,43 v49.1,43 | 43.22,43.56 U$23.3 43.25,42.72 v43.23,42.7
N$32  (via drill 0.35)
  Top 0.3: v46.56,23.63 45.2,23.63 v45.11,23.73
  Bottom 0.3: R30.2 R28.2 46.64,23.55 v46.56,23.63 | v45.11,23.73 45.11,23.44 45.25,23.3 45.25,21.45 45.2,21.41 45.2,21 45.15,20.95 U$22.1
N$35  (via drill 0.35)
  Top 0.3: v45.11,24.68 46.55,24.68 v46.56,24.7
  Bottom 0.3: v45.11,24.68 44.88,24.46 44.8,24.46 44.38,24.03 44.38,23.43 44.6,23.2 U$22.3 | v46.56,24.7 47.1,24.7 48.2,25.8 49.59,25.8 50.45,24.95 R31.2 R29.2
NH3
  Bottom 0.3: JP3.15 60,13.49 60,9.59 59.48,9.07 34.22,9.07 15.8,27.49 15.8,34.68 18.18,37.05 18.18,37.62 U$14.P$10
NO2
  Bottom 0.3: JP3.14 59.5,15.53 59.5,9.8 59.27,9.57 45.5,9.57 45.47,9.6 34.4,9.6 16.3,27.7 16.3,32.9 17.82,32.9 18.18,32.55 18.18,31.98 U$14.P$7
OE_SR  (via drill 0.35)
  Top 0.3: v52.4,28.2 50.63,29.97 45.2,29.97 42.92,32.25 42.92,37.68 41.9,38.7 38.87,38.7 37.47,40.1 37.47,41.73 v37.4,41.8
  Bottom 0.3: U$13.13 35.48,44.48 R14.2 35.55,43.65 v37.4,41.8 | JP3.11 58.38,22.03 STM32F411.25 52.4,25.13 v52.4,28.2
PERE1  (via drill 0.35)
  Top 0.3: R23.1 48.85,44.7 45.23,44.7 43.61,46.32 36.02,46.32 35.8,46.1 29.9,46.1 29.8,46 v29.8,45.9
  Bottom 0.3: v29.8,45.9 28.88,45.9 28.79,45.8 28.13,45.8 U$13.6
PERE2
  Bottom 0.3: U$13.7 27.98,46.3 27.32,46.3 27.12,46.1 27.12,45.1 27.02,45 25.4,45 25.4,43.1 25.6,42.9 27.12,42.9 27.12,29.38 27.3,29.2 33.95,29.2 R25.1
RX_GPS  (via drill 0.35)
  Top 0.3: JP4.11 18.04,28.57 19.5,30.03 28.03,30.03 v28.1,30.1
  Bottom 0.3: v28.1,30.1 30.79,30.1 STM32F411.9
RX_LIDAR
  Bottom 0.3: JP3.7 58.38,32.19 STM32F411.29
RX_RADIO
  Bottom 0.3: JP3.5 58.38,37.27 STM32F411.31
SCK_SENS  (via drill 0.35)
  Top 0.3: v10.3,27.1 12.5,27.1 v12.6,27.2 | v14.4,34.4 15.5,34.4 17.53,32.37 22.47,32.37 v28.2,38.1 | v31.55,43.67 31.55,43.65 v30,43.65 | STM32F411.11 34.67,34.73 v30.3,39.1
  Bottom 0.3: JP4.12 9.07,27.1 v10.3,27.1 | v12.6,27.2 14.4,29 v14.4,34.4 | v28.2,38.1 29.8,39.7 | 29.8,39.7 29.85,39.75 29.85,43.5 v30,43.65 | v31.55,43.67 31.55,44.42 32.9,45.77 U$13.11 | v30.3,39.1 29.8,39.6 29.8,39.7
SCL  (via drill 0.35)
  Top 0.3: 53.2,50.2 R4.1 52.9,50.2 | 53.2,50.2 55.27,50.2 STM32F411.36 | 37.05,50.75 33.03,54.77 BME280.P$2 | 53.2,50.2 52.2,51.2 52.2,53.2 51.99,53.4 49.27,53.4 46.97,51.1 38,51.1 37.7,51.4 37.05,50.75 | 37.05,50.75 v36.19,49.89 | v21.47,42.7 24.26,42.7 28.19,46.63 31.23,46.63 v32.4,47.8
  Bottom 0.3: BME280.P$2 31.2,56.2 30.9,56.2 | STM32F411.36 63.46,49.97 JP3.2 | v36.19,49.89 34.48,49.89 v32.4,47.8 | 22.07,37.77 U$14.P$16 23.55,39.1 23.55,39.8 22.97,39.8 21.8,40.96 21.8,42.37 v21.47,42.7
  Bottom 0.4: U$16.4 29.12,54.73 29.45,55.05 29.45,56.2 30.9,56.2
SDA  (via drill 0.35)
  Top 0.3: v52.5,57.6 53.05,57.05 R3.1 STM32F411.37 | v19.48,42.8 21.35,44.67 24.99,44.67 28.07,47.75 29.55,47.75 30.38,48.58 33.09,48.58 33.74,49.23 33.74,50.15 32.77,51.12 31.94,51.12 30.98,52.08 v28.42,52.08 | v25.8,53.45 26.32,53.97 26.32,54.43 v26.77,54.88
  Bottom 0.3: 30.9,56.8 32.12,56.8 BME280.P$1 38.45,57.31 39.28,56.48 41.77,56.48 42.89,57.6 v52.5,57.6 | STM32F411.37 63.46,52.51 JP3.1 | 21.57,37.77 U$14.P$15 21.5,38.62 20.75,39.37 20.15,39.37 19.71,39.81 19.71,42.57 v19.48,42.8 | U$16.3 27.9,55.27 27.41,55.27 27.01,54.88 v26.77,54.88 | v25.8,53.45 27.05,53.45 v28.42,52.08
  Bottom 0.4: U$16.3 28.05,55.42 28.62,55.42 28.85,55.66 28.85,56.6 29.05,56.8 30.9,56.8
SHIFT
  Bottom 0.3: JP4.5 12.02,47.83 14.25,47.83 14.7,47.38 18,47.38 19.73,49.1 29.77,49.1 31.8,47.08 U$13.9
SP+  (1 unrouted)
  Bottom 0.3: SP.1 21.27,8.57 21.35,8.72 21.27,9.04 21.27,9.63 1.78,29.12 1.6,29.8 1.6,46.2 2.83,50.8 4.26,53.86 6.5,56.1 12.9,56.1 12.9,53.71
  Bottom 0.5: R18.1 18.1,52.5 18,52.6 | R20.2 14.99,52.6 14.89,52.5 14.11,52.5 12.9,53.71
SP-  (via drill 0.35)
  Top 0.3: v11.3,57.3 v11.3,43.7
  Bottom 0.3: v11.3,57.3 11.3,63.2 11.6,63.5 17.65,63.5 17.66,63.51 32.31,63.51 R21.2 | v11.3,43.7 11.3,20.9 23.3,8.9 23.3,7.81 20.51,5.02 18.32,7.21 19.5,8.4 SP.2
SWITCH
  Top 0.3: U$2.2 46.98,2.42 48.74,2.42 49.58,3.27 STATE.A 50.66,3.75 51.19,4.27 51.19,7.56 STM32F411.21
TX_GPS  (via drill 0.35)
  Top 0.3: JP4.10 v28.09,31.11 v28.1,31.1 | v37,38.2 37,39.86 36.67,40.19 36.67,42.1 37.1,42.53 37.7,42.53 37.88,42.35 STM32F411.8
  Bottom 0.3: v28.1,31.1 35.2,38.2 v37,38.2
TX_LIDAR
  Bottom 0.3: JP3.8 58.38,29.65 STM32F411.28
TX_RADIO
  Bottom 0.3: JP3.6 58.38,34.73 STM32F411.30

## Text on the board
bNames: 3V3 | GND | 5V | MOSI | SCK | LATCH | TX1 | STEP